# Altium PCB NetV510.PcbDoc
Units mm, origin at the board's own origin, x right, y up, seen from the top; angles counter-clockwise.
Board outline 56.26 x 36.2 mm, 2 copper layers (Top Layer, Bottom Layer); 80 components, 68 nets, 310 pads, 77 vias.
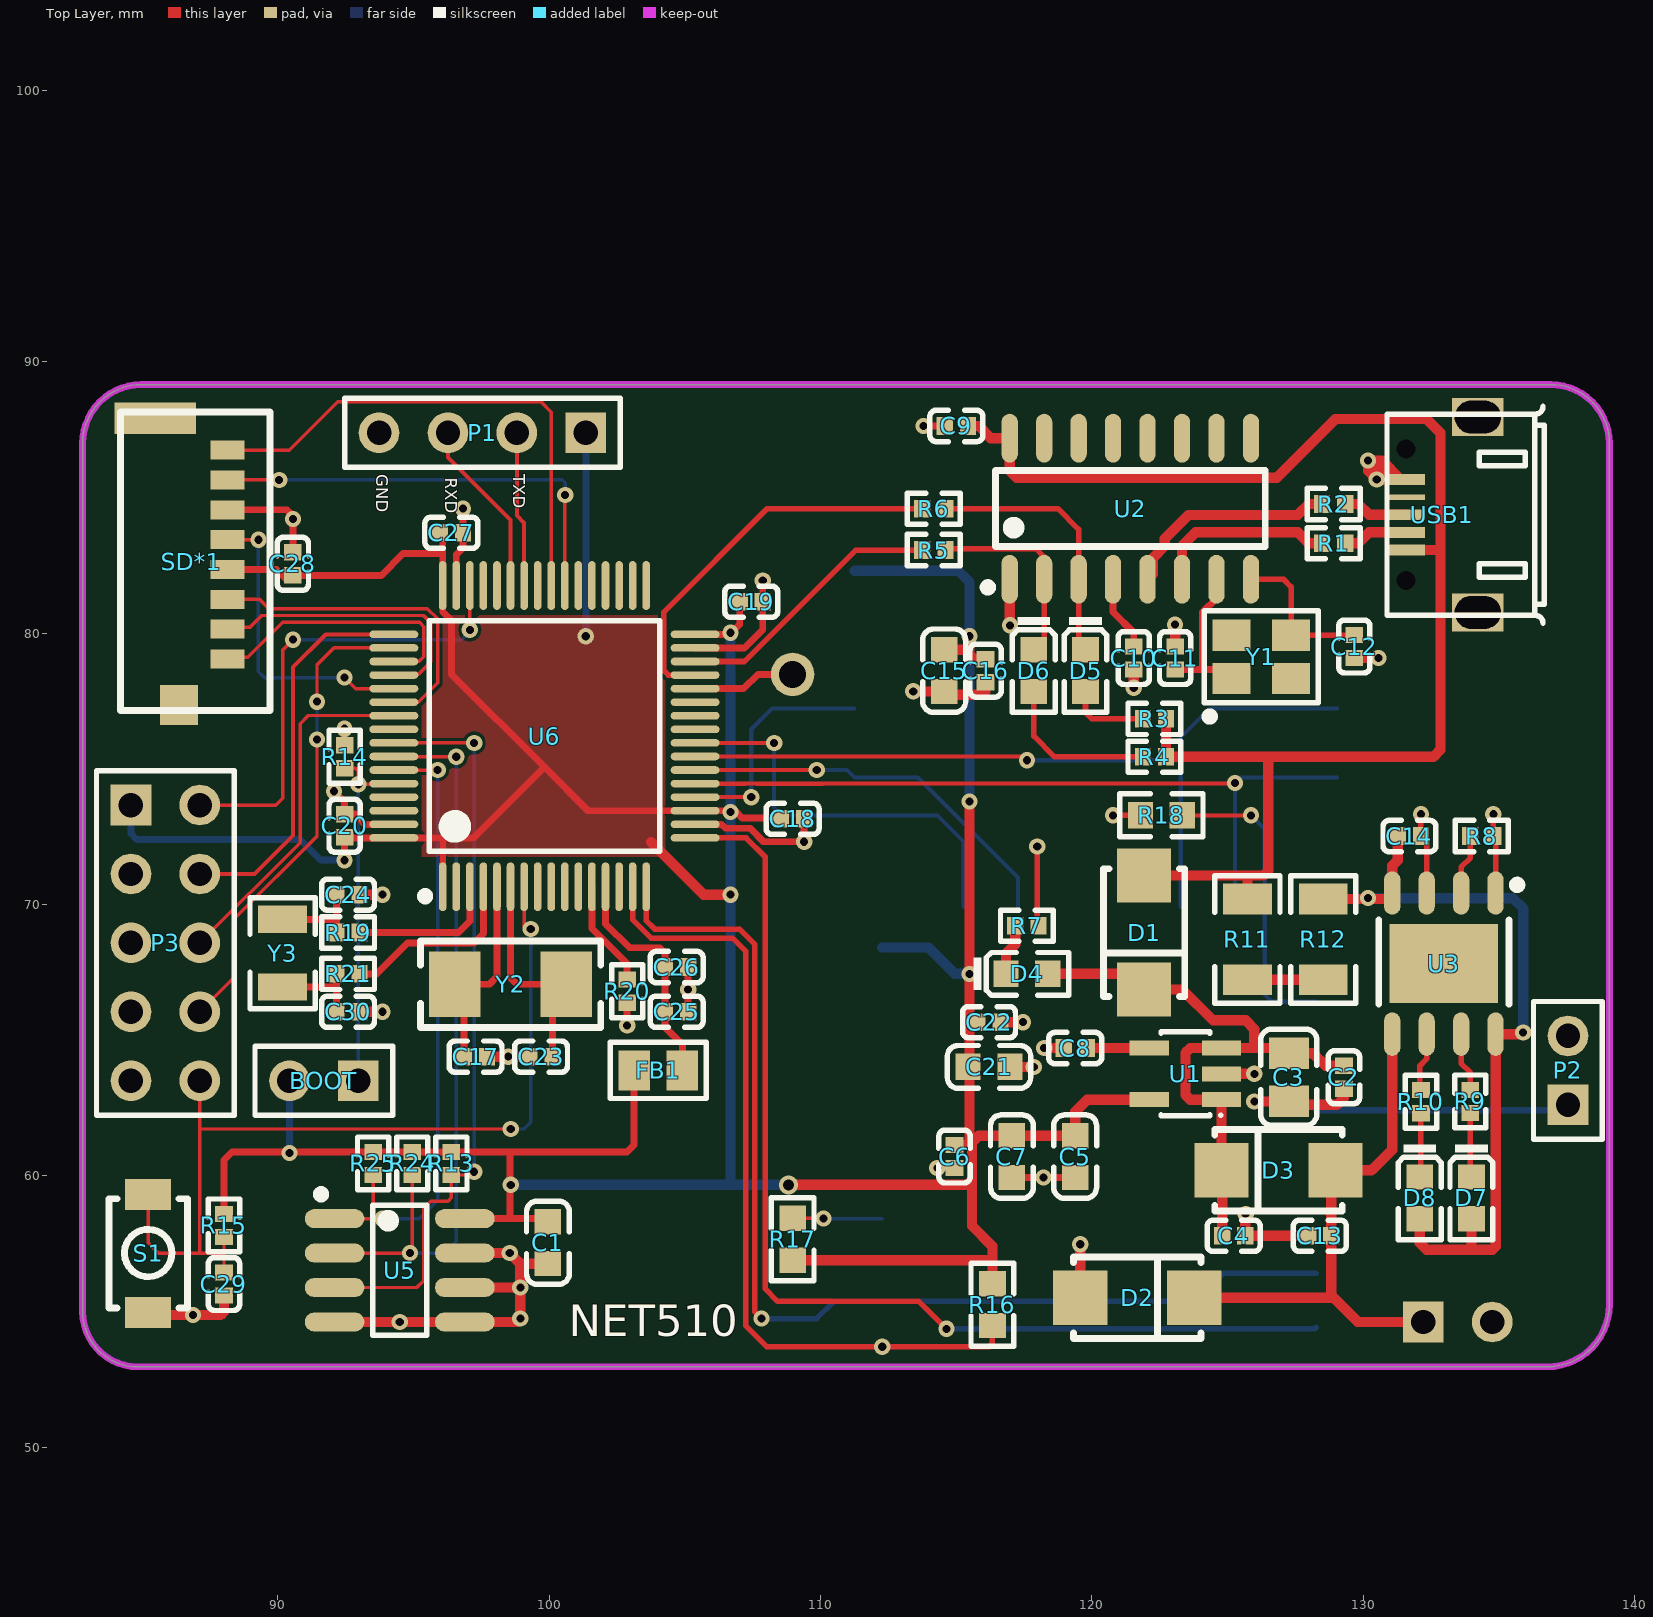
[diagram p0: Top Layer view]
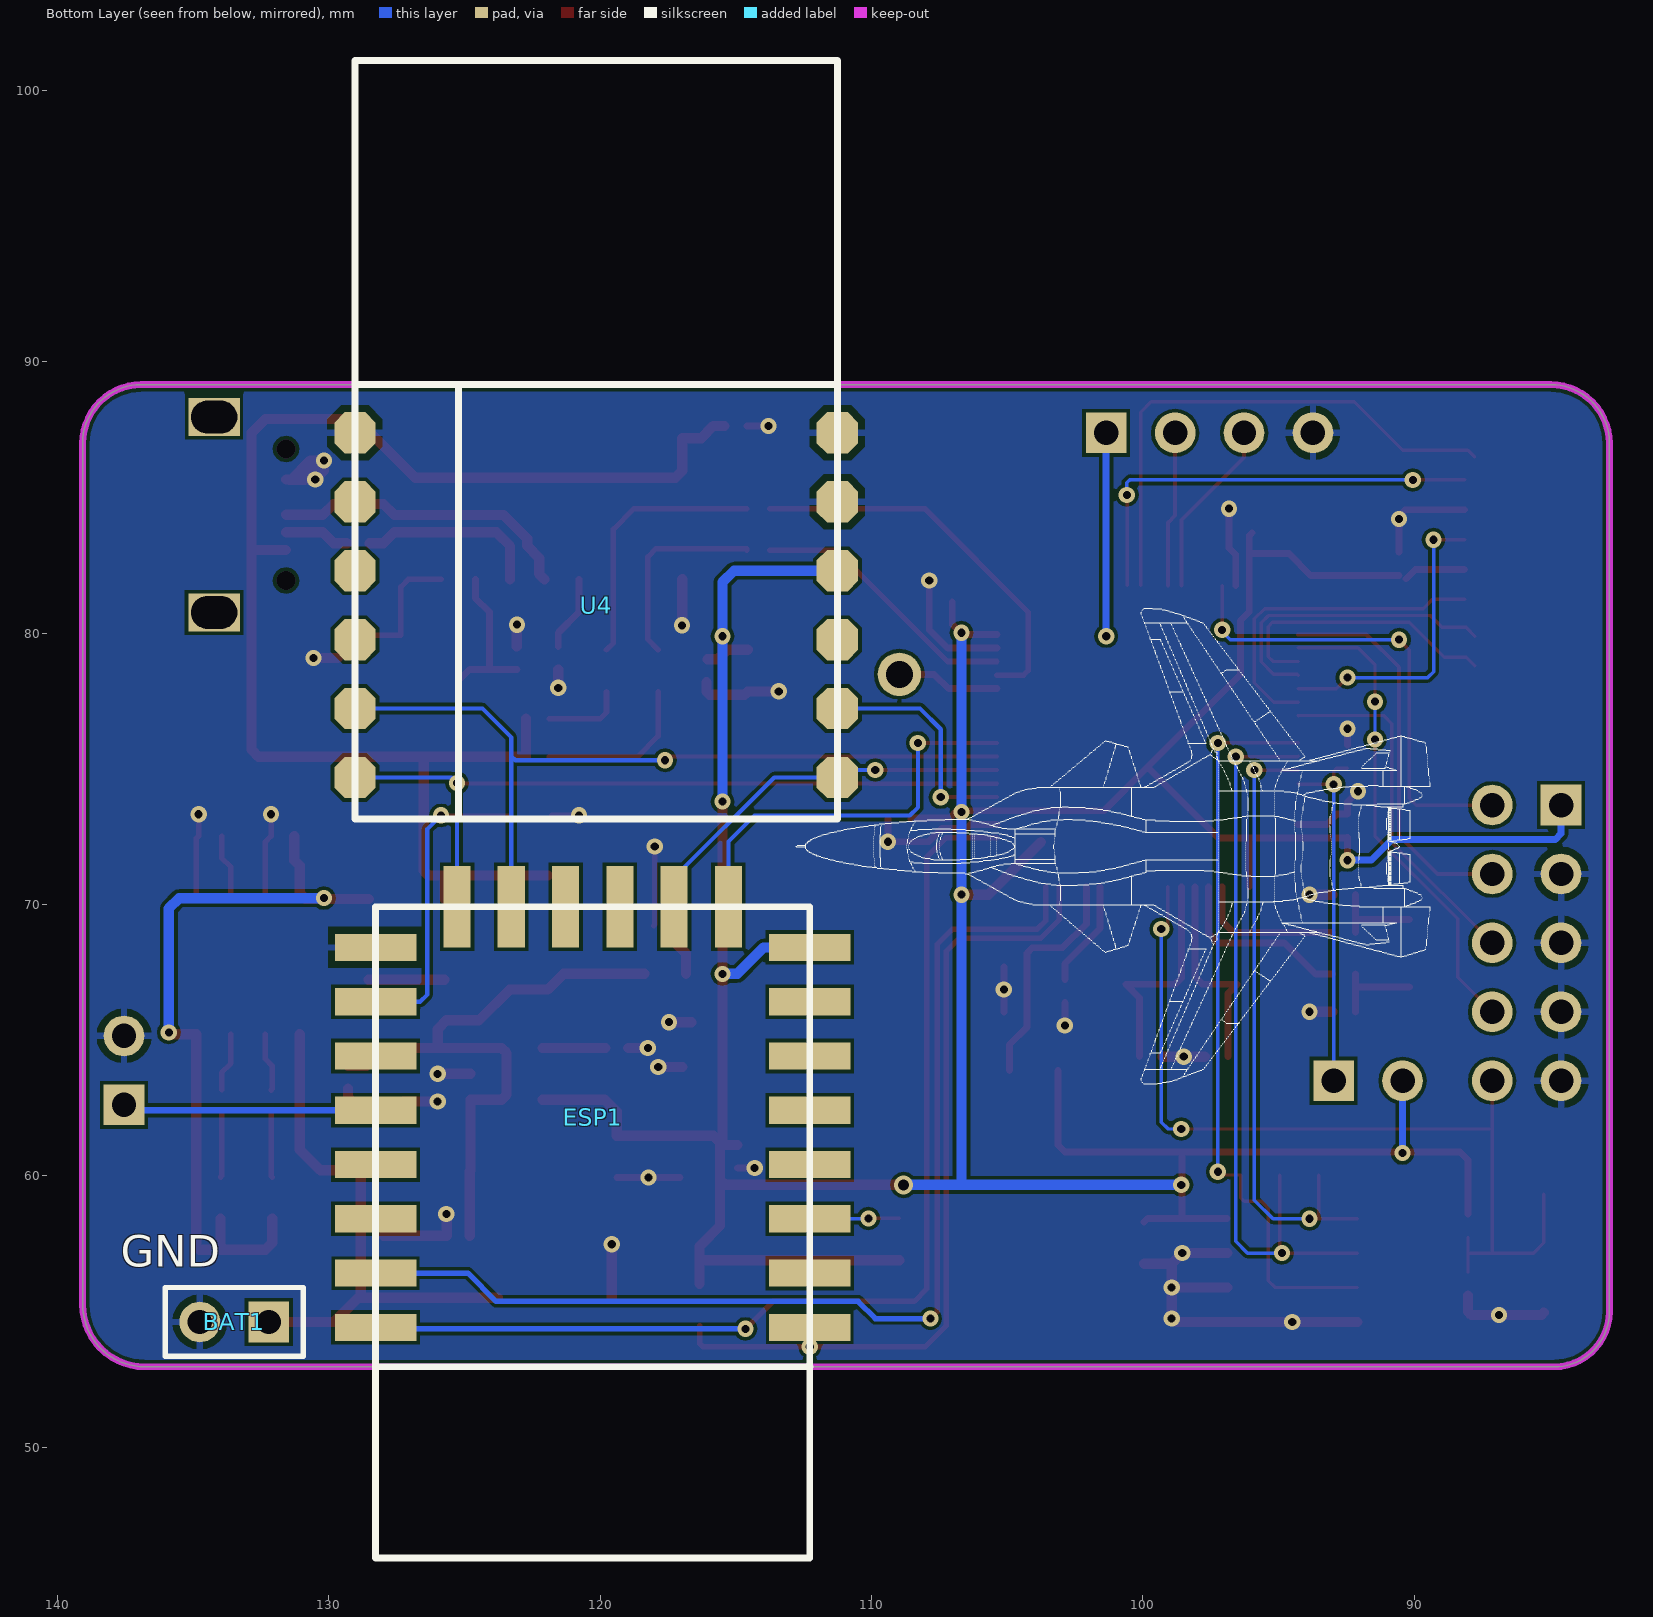
[diagram p1: Bottom Layer view, seen from below]

## Layer stack, top to bottom
Top Solder: solder mask 0.0102, Solder Resist, Dk 3.5
Top Layer: signal copper 0.0356
Dielectric 1: dielectric 0.32, FR-4, Dk 4.8
Bottom Layer: signal copper 0.0356
Bottom Solder: solder mask 0.0102, Solder Resist, Dk 3.5

## Board outline
82.804,54.991 ccw(c84.836,54.991) 84.836,52.959 136.779,52.959 ccw(c136.779,55.245) 139.065,55.245 139.065,86.995 ccw(c136.906,86.995) 136.906,89.154 84.963,89.154 ccw(c84.963,86.995) 82.804,86.995

## Design rules (kind name [scope] priority, off if disabled: settings)
Clearance [All] p1: gap=0.127 ignorepadtopadclearanceinfootprint=FALSE except(0: Arc-Hole Track-Hole SMDPad-Hole THPad-Hole Via-Hole Fill-Hole Poly-Hole Region-Hole Text-Hole; 0.254: Arc-Text Track-Text SMDPad-Text THPad-Text Via-Text Fill-Text Poly-Text Region-Text Text-Text)
DiffPairsRouting [All] p1: maxlimit=0.254 minlimit=0.254 mostfreqgap=0.254 toplayer_minwidth=0.381 toplayer_maxwidth=0.381 toplayer_prefwidth=0.381 bottomlayer_minwidth=0.381 bottomlayer_maxwidth=0.381 bottomlayer_prefwidth=0.381 maxuncoupledlength=12.7
PolygonConnect [All] p1: thpad.connectstyle=Relief thpad.reliefconductorwidth=0.254 thpad.reliefentries=4 thpad.polygonreliefangle="90 Angle" thpad.airgapwidth=0.254 smdpad.connectstyle=Relief smdpad.reliefconductorwidth=0.254 smdpad.reliefentries=4 smdpad.polygonreliefangle="90 Angle" smdpad.airgapwidth=0.254 via.connectstyle=Direct via.reliefconductorwidth=0.254 via.reliefentries=4 via.polygonreliefangle="90 Angle" via.airgapwidth=0.254
RoutingVias [All] p1: holewidth=0.711 width=1.27 viastyle="Through Hole" minholewidth=0.3 minwidth=0.6 maxholewidth=0.711 maxwidth=1.27
SolderMaskExpansion [All] p1: expansion=0.102
Width [All] p1: maxlimit=2.032 minlimit=0.127 preferedwidth=0.254 minimp=50.000000 maximp=50.000000 favimp=50.000000
29 further rules are at their usual default settings.

## Classes and differential pairs
differential pair USB: +USB_P -USB_N
differential pair USB0: +USB0_P -USB0_N

## Components (designator, comment, footprint, x,y, rotation, side; value= is the part's Value field where it differs from the comment)
BAT1 "Header 2" HDR1X2 132.207,54.61 r0 bottom
BOOT "Header 2" HDR1X2 92.964,63.5 r180 top
C1 "22uF (226) 20% 6.3V" 0603_C 99.949,57.531 r90 top
C2 "1.0uF (105) 10% 25V" 0402_C 129.286,63.627 r90 top
C3 "22uF (226) 20% 25V" 0805_C 127.254,63.627 r90 top
C4 "10nF (103) 10% 50V" 0402_C 125.222,57.785 r180 top
C5 "2.2uF (225) 10% 16V" 0603_C 119.38,60.706 r270 top
C6 "10nF (103) 10% 50V" 0402_C 114.935,60.706 r270 top
C7 "22uF (226) 20% 6.3V" 0603_C 117.05,60.706 r270 top
C8 "470pF (471) 10% 50V" 0402_C 119.38,64.704 r180 top
C9 "4.7uF (475) 20% 10V" 0402_C 115.002,87.63 r0 top
C10 "1.0uF (105) 10% 25V" 0402_C 121.539,79.077 r90 top
C11 "22pF (220) 5% 50V" 0402_C 123.063,79.077 r270 top
C12 "22pF (220) 5% 50V" 0402_C 129.667,79.502 r90 top
C13 "10uF" 0402_C 128.397,57.785 r0 top
C14 "10uF" 0402_C 131.699,72.517 r180 top
C15 "22uF (226) 20% 6.3V" 0603_C 114.554,78.613 r270 top
C16 "100nF (104) 10% 16V" 0402_C 116.078,78.613 r90 top
C17 "20pF (200) 5% 50V" 0402_C 97.282,64.389 r180 top
C18 "100nF (104) 10% 16V" 0402_C 108.966,73.152 r180 top
C19 "100nF (104) 10% 16V" 0402_C 107.442,81.153 r180 top
C20 "100nF (104) 10% 16V" 0402_C 92.456,72.898 r270 top
C21 "22uF (226) 20% 6.3V" 0603_C 116.205,64.008 r180 top
C22 "100nF (104) 10% 16V" 0402_C 116.205,65.659 r180 top
C23 "20pF (200) 5% 50V" 0402_C 99.695,64.389 r0 top
C24 "4.7pF (4R7) 0.25pF 50V" 0402_C 92.583,70.358 r180 top
C25 "100nF (104) 10% 16V" 0402_C 104.693,66.04 r0 top
C26 "10nF (103) 10% 50V" 0402_C 104.693,67.691 r0 top
C27 "100nF (104) 10% 16V" 0402_C 96.393,83.693 r180 top
C28 "100nF (104) 10% 16V" 0402_C 90.551,82.55 r90 top
C29 "100nF (104) 10% 16V" 0402_C 88.011,56.007 r90 top
C30 "4.7pF (4R7) 0.25pF 50V" 0402_C 92.583,66.04 r180 top
D1 "SS54" SMA(DO-214AC)_S1 121.92,68.961 r90 top
D2 "M7" SMA(DO-214AC)_S1 121.666,55.499 r180 top
D3 "SS54" SMA(DO-214AC)_S1 126.873,60.198 r0 top
D4 "白灯 0603" 0603_LED_S1 117.602,67.437 r0 top
D5 "黄灯 0603" 0603_LED_S1 119.761,78.613 r270 top
D6 "绿灯 0603" 0603_LED_S1 117.856,78.613 r270 top
D7 "红灯 0603" 0603_LED_S1 133.985,59.182 r270 top
D8 "绿灯 0603" 0603_LED_S1 132.08,59.182 r270 top
ESP1 "ESP-12" ESP-12 120.269,57.912 r0 bottom locked
FB1 "600Ω ±25% 100MHz" 0805_L 104.013,63.881 r0 top
P1 "Header 4" HDR1X4 101.346,87.376 r180 top
P2 "Header 2" HDR1X2 137.541,62.611 r90 top
P3 "JTAG" HDR2X5 84.582,73.66 r270 top
R1 "0Ω (0R0) ±1%" 0402_R 128.905,83.312 r180 top
R2 "0Ω (0R0) ±1%" 0402_R 128.905,84.754 r180 top
R3 "5.1KΩ (5101) ±1%" 0402_R 122.301,76.835 r0 top
R4 "5.1KΩ (5101) ±1%" 0402_R 122.301,75.438 r0 top
R5 "51Ω (51R0) ±1%" 0402_R 114.173,83.058 r0 top
R6 "51Ω (51R0) ±1%" 0402_R 114.173,84.582 r0 top
R7 "5.1KΩ (5101) ±1%" 0402_R 117.602,69.215 r0 top
R8 "1.2KΩ" 0402_R 134.366,72.517 r180 top
R9 "1KΩ" 0402_R 133.941,62.737 r270 top
R10 "1KΩ" 0402_R 132.124,62.73 r270 top
R11 "0.1Ω (R100) ±1%" 1206_R 125.73,68.707 r270 top
R12 "0.1Ω (R100) ±1%" 1206_R 128.524,68.707 r90 top
R13 "200KΩ (2003) ±1%" 0402_R 96.393,60.452 r90 top
R14 "10KΩ (1002) ±1%" 0402_R 92.456,75.438 r90 top
R15 "10KΩ (1002) ±1%" 0402_R 88.011,58.166 r270 top
R16 "10KΩ" 0603_R 116.332,55.245 r270 top
R17 "1KΩ" 0603_R 108.966,57.658 r90 top
R18 "1KΩ" 0603_R 122.555,73.279 r180 top
R19 "0Ω (0R0) ±1%" 0402_R 92.583,68.961 r0 top
R20 "0Ω (0R0) ±1%" 0402_R 102.87,66.802 r270 top
R21 "0Ω (0R0) ±1%" 0402_R 92.583,67.437 r0 top
R24 "10KΩ (1002) ±1%" 0402_R 94.952,60.452 r90 top
R25 "10KΩ (1002) ±1%" 0402_R 93.508,60.452 r90 top
S1 "SW-PB" "key 3*4*2" 85.217,57.15 r90 top
SD*1 "TF_card" TF卡座(短体) 84.201,88.138 r270 top
U1 "MIC5219" SOT-23-5 123.444,63.754 r90 top
U2 "CH340G" SOIC-16_150mil 121.412,84.582 r0 top
U3 "TP4056" SOP-8_EP_150mil 132.969,67.818 r180 top
U4 "MRF24J40" MRF24J40 129.032,73.152 r180 bottom locked
U5 "LM75B" LC-SOIC-8_150mil 94.488,56.515 r270 top
U6 "STM32F103RET6" LQFP-64_10x10x05P 99.822,76.2 r0 top
USB1 "USB_5line" USB-MICRO-5P-2F 131.572,83.058 r270 top
Y1 "12MHZ 20PF 10PPM" SMD-3225_4P 126.238,79.121 r0 top
Y2 "8MHz ±20ppm 20pF" SMD-5032_2P 98.572,67.056 r180 top
Y3 "32.768KHz ±20ppm 12.5pF" "SMD-3215_2P FC - 135" 90.17,68.199 r90 top

## Footprints (in the part's own frame and the unit in brackets; to place one, negate y for a bottom-side part, rotate by r counter-clockwise, add the part's x,y. Pads: shape width x height; smd on the part's side, far side on the other; paste and mask are expansions set on the pad)
0402_C [mm]
  rect 0.6x0.65 smd mask+0.051: 1(-0.425,0) 2(0.425,0)
  silkscreen extent -0.97,-0.58 0.97,0.58, body extent -0.48,-0.3 0.52,0.3, height 0.2
0402_R [mm]
  rect 0.6x0.65 smd mask+0.051: 1(-0.425,0) 2(0.425,0)
  silkscreen extent -0.97,-0.58 0.97,0.58, body extent -0.57,-0.27 0.58,0.28, height 0.41
0603_C [mm]
  rect 0.93x0.98 smd: 1(-0.77,0) 2(0.77,0)
  silkscreen extent -1.53,-0.79 1.54,0.79, body extent -0.8,-0.4 0.8,0.4, height 0.3
0603_LED_S1 [mm]
  rect 0.93x0.98 smd: A(0.77,0) K(-0.77,0)
  silkscreen extent -1.97,-0.79 1.54,0.79, body extent -0.8,-0.4 0.8,0.4, height 0.6
0603_R [mm]
  rect 0.93x0.98 smd: 1(-0.77,0) 2(0.77,0)
  silkscreen extent -1.53,-0.79 1.54,0.79, body extent -0.85,-0.4 0.85,0.4, height 0.56
0805_C [mm]
  rect 1.16x1.47 smd: 1(-0.89,0) 2(0.89,0)
  silkscreen extent -1.77,-1.04 1.77,1.04, body extent -1,-0.62 1,0.63, height 0.77
0805_L [mm]
  rect 1.16x1.47 smd: 1(-0.89,0) 2(0.89,0)
  silkscreen extent -1.77,-1.04 1.77,1.03, body extent -1.02,-0.64 1.03,0.64, height 0.6
1206_R [mm]
  rect 1.13x1.8 smd: 1(-1.49,0) 2(1.49,0)
  silkscreen extent -2.36,-1.2 2.35,1.2, body extent -1.7,-0.86 1.65,0.87, height 0.85
ESP-12 [mm]
  rect 3x1 smd: 1(-8,3.5) 2(-8,1.5) 3(-8,-0.5) 4(-8,-2.5) 5(-8,-4.5) 6(-8,-6.5) 7(-8,-8.5) 8(-8,-10.5) 15(8,-10.5) 16(8,-8.5) 17(8,-6.5) 18(8,-4.5) 19(8,-2.5) 20(8,-0.5) 21(8,1.5) 22(8,3.5)
  rect 1x3 smd: 9(-5,-12) 10(-3,-12) 11(-1,-12) 12(1,-12) 13(3,-12) 14(5,-12)
  silkscreen extent -8,-12 8,12
HDR1X2 [mm] "Connector; Header; 2 Position"
  rect 1.5x1.5 hole 0.9: 1(0,0)
  round 1.5 hole 0.9: 2(2.54,0)
  silkscreen extent -1.27,-1.27 3.81,1.27, body extent -1.27,-1.27 3.81,1.27, height 7.58
HDR1X4 [mm] "Connector; Header; 4 Position"
  rect 1.5x1.5 hole 0.9: 1(0,0)
  round 1.5 hole 0.9: 2(2.54,0) 3(5.08,0) 4(7.62,0)
  silkscreen extent -1.27,-1.27 8.89,1.27, body extent -1.27,-1.27 8.89,1.27, height 7.58
HDR2X5 [mm] "Connector; Header; 5x2 Position"
  rect 1.5x1.5 hole 0.9: 1(0,0)
  round 1.5 hole 0.9: 2(0,2.54) 3(2.54,0) 4(2.54,2.54) 5(5.08,0) 6(5.08,2.54) 7(7.62,0) 8(7.62,2.54) 9(10.16,0) 10(10.16,2.54)
  silkscreen extent -1.27,-1.27 11.43,3.81
"key 3*4*2" [mm]
  rect 1.15x1.7 smd: 1(-2.191,0) 2(2.159,0)
  silkscreen extent -2.03,-1.45 2,1.45
LC-SOIC-8_150mil [mm]
  oval 0.7x2.2 smd: 1(-1.905,-2.4) 2(-0.635,-2.4) 3(0.635,-2.4) 4(1.905,-2.4) 5(1.905,2.4) 6(0.635,2.4) 7(-0.635,2.4) 8(-1.905,2.4)
  silkscreen extent -2.95,-3.05 2.4,1
LQFP-64_10x10x05P [mm]
  oval 0.28x1.8 smd mask+0.051: 1(-3.75,-5.55) 2(-3.25,-5.55) 3(-2.75,-5.55) 4(-2.25,-5.55) 5(-1.75,-5.55) 6(-1.25,-5.55) 7(-0.75,-5.55) 8(-0.25,-5.55) 9(0.25,-5.55) 10(0.75,-5.55) 11(1.25,-5.55) 12(1.75,-5.55) 13(2.25,-5.55) 14(2.75,-5.55) 15(3.25,-5.55) 16(3.75,-5.55) 33(3.75,5.55) 34(3.25,5.55) 35(2.75,5.55) 36(2.25,5.55) 37(1.75,5.55) 38(1.25,5.55) 39(0.75,5.55) 40(0.25,5.55) 41(-0.25,5.55) 42(-0.75,5.55) 43(-1.25,5.55) 44(-1.75,5.55) 45(-2.25,5.55) 46(-2.75,5.55) 47(-3.25,5.55) 48(-3.75,5.55)
  oval 1.8x0.28 smd mask+0.051: 17(5.55,-3.75) 18(5.55,-3.25) 19(5.55,-2.75) 20(5.55,-2.25) 21(5.55,-1.75) 22(5.55,-1.25) 23(5.55,-0.75) 24(5.55,-0.25) 25(5.55,0.25) 26(5.55,0.75) 27(5.55,1.25) 28(5.55,1.75) 29(5.55,2.25) 30(5.55,2.75) 31(5.55,3.25) 32(5.55,3.75) 49(-5.55,3.75) 50(-5.55,3.25) 51(-5.55,2.75) 52(-5.55,2.25) 53(-5.55,1.75) 54(-5.55,1.25) 55(-5.55,0.75) 56(-5.55,0.25) 57(-5.55,-0.25) 58(-5.55,-0.75) 59(-5.55,-1.25) 60(-5.55,-1.75) 61(-5.55,-2.25) 62(-5.55,-2.75) 63(-5.55,-3.25) 64(-5.55,-3.75)
  silkscreen extent -4.55,-6.05 4.25,4.25
MRF24J40 [mil]
  oct 60x60 smd: 1(0,560) 2(0,460) 3(0,360) 4(0,260) 5(0,160) 6(0,60) 7(700,60) 8(700,160) 9(700,260) 10(700,360) 11(700,460) 12(700,560)
  silkscreen extent 0,0 700,1100
SMA(DO-214AC)_S1 [mm]
  rect 2x2 smd: 1(2.1,0) 2(-2.1,0)
  silkscreen extent -2.35,-1.5 2.35,1.5
"SMD-3215_2P FC - 135" [mm]
  rect 1x1.8 smd: 1(-1.25,0) 2(1.25,0)
  silkscreen extent -2.05,-1.2 2.05,1.2
SMD-3225_4P [mm]
  rect 1.4x1.15 smd: 1(-1.1,-0.8) 2(1.1,-0.8) 3(1.1,0.8) 4(-1.1,0.8)
  silkscreen extent -2.1,-2.35 2.1,1.7, body extent -1.6,-1.25 1.6,1.25, height 0.61
SMD-5032_2P [mm]
  rect 1.9x2.4 smd: 1(-2.05,0) 2(2.05,0)
  silkscreen extent -3.32,-1.6 3.32,1.6
SOIC-16_150mil [mm]
  oval 0.6x1.8 smd: 1(-4.445,-2.6) 2(-3.175,-2.6) 3(-1.905,-2.6) 4(-0.635,-2.6) 5(0.635,-2.6) 6(1.905,-2.6) 7(3.175,-2.6) 8(4.445,-2.6) 9(4.445,2.6) 10(3.175,2.6) 11(1.905,2.6) 12(0.635,2.6) 13(-0.635,2.6) 14(-1.905,2.6) 15(-3.175,2.6) 16(-4.445,2.6)
  silkscreen extent -5.4,-3.05 4.97,1.4, body extent -4.95,-2.97 4.95,3.03, height 1.75
SOP-8_EP_150mil [mm]
  rect 4x2.9 smd: 0(0,0)
  oval 0.6x1.6 smd: 1(-1.905,-2.6) 2(-0.635,-2.6) 3(0.635,-2.6) 4(1.905,-2.6) 5(1.905,2.6) 6(0.635,2.6) 7(-0.635,2.6) 8(-1.905,2.6)
  silkscreen extent -2.85,-3.05 2.4,1.5
SOT-23-5 [mm] "SOT-23/SC-74A; 5 Leads; Body 3.1 x 3 mm, inc. leads (LxW max)"
  rect 0.55x1.45 smd: 1(-0.95,-1.329) 2(0,-1.329) 3(0.95,-1.329) 4(0.95,1.329) 5(-0.95,1.329)
  silkscreen extent -1.57,-1.35 1.55,0.9
TF卡座(短体) [mm]
  rect 1.15x3 smd: 0(0.227,1.27)
  rect 1.48x1.4 smd: 0(10.795,2.159)
  rect 0.7x1.25 smd: 1(9.097,3.937) 2(7.997,3.937) 3(6.897,3.937) 4(5.797,3.937) 5(4.697,3.937) 6(3.597,3.937) 7(2.497,3.937) 8(1.397,3.937)
  silkscreen extent 0,0 11,5.5
USB-MICRO-5P-2F [mm]
  round 0 hole 0.7: 0(-3.725,0) 0(1.125,0)
  rect 0.4x1.4 smd: 1(0,0) 2(-0.65,0) 3(-1.3,0) 5(-2.6,0)
  rect 0.2x1.4 smd: 4(-1.95,0)
  rect 1.4x1.9 hole 1.2 slot 1.7 at 90 deg: 6(2.3,2.65) 7(-4.9,2.65)
  silkscreen extent -5.3,-0.7 2.7,5.1

## Part data
BAT1 BOOT P2: "Header, 2-Pin", LatestRevisionDate=17-Jul-2002, LatestRevisionNote="Re-released for DXP Platform.", Publisher="Altium Limited"
C1 C7 C15 C21: library part "0603 22uF (226) 20% 6.3V", "贴片电容", Package=0603, SuppliersPartNumber=C59461, ComponentLink1URL=http://www.szlcsc.com/product/details_60514.html, Supplier=LC
  C1 C15 C21: ComponentLink1Description=供应商
  C7: ComponentLink1Description=供应商链接
C2 C10: library part "0402 1.0uF (105) 10% 25V", "贴片电容", Package=0402, SuppliersPartNumber=C52923, ComponentLink1Description=供应商链接, ComponentLink1URL=http://www.szlcsc.com/product/details_53938.html, Supplier=LC
C3: library part "0805 22uF (226) 20% 25V", "贴片电容", Package=0805, SuppliersPartNumber=C45783, ComponentLink1Description=供应商链接, ComponentLink1URL=http://www.szlcsc.com/product/details_46786.html, Supplier=LC
C4 C6 C26: library part "0402 10nF (103) 10% 50V", "贴片电容", Package=0402, SuppliersPartNumber=C15195, ComponentLink1Description=供应商链接, ComponentLink1URL=http://www.szlcsc.com/product/details_15869.html, Supplier=LC
C5: library part "0603 2.2uF (225) 10% 16V", "贴片电容", Package=0603, SuppliersPartNumber=C23630, ComponentLink1Description=供应商链接, ComponentLink1URL=http://www.szlcsc.com/product/details_24366.html, Supplier=LC
C8: library part "0402 470pF (471) 10% 50V", "贴片电容", Package=0402, SuppliersPartNumber=C1537, ComponentLink1Description=供应商链接, ComponentLink1URL=http://www.szlcsc.com/product/details_1889.html, Supplier=LC
C9: library part "0402 4.7uF (475) 20% 10V", "贴片电容", Package=0402, SuppliersPartNumber=C23733, ComponentLink1Description=供应商链接, ComponentLink1URL=http://www.szlcsc.com/product/details_24469.html, Supplier=LC
C11 C12: library part "0402 22pF (220) 5% 50V", "贴片电容", Package=0402, SuppliersPartNumber=C1555, ComponentLink1Description=供应商链接, ComponentLink1URL=http://www.szlcsc.com/product/details_1907.html, Supplier=LC
C13 C14: library part "0402 10uF (106) 20% 6.3V", "贴片电容", Package=0402, SuppliersPartNumber=C15525, ComponentLink1Description=供应商, ComponentLink1URL=http://www.szlcsc.com/product/details_16204.html, Supplier=LC
C16 C18 C19 C20 C22 C25 C27 C28 C29: library part "0402 100nF (104) 10% 16V", "贴片电容", Package=0402, SuppliersPartNumber=C1525, ComponentLink1URL=http://www.szlcsc.com/product/details_1877.html, Supplier=LC
  C16 C18 C19 C20 C22 C25 C29: ComponentLink1Description=供应商链接
  C27 C28: ComponentLink1Description=供应商
C17 C23: library part "0402 20pF (200) 5% 50V", "贴片电容", Package=0402, SuppliersPartNumber=C1554, ComponentLink1Description=供应商链接, ComponentLink1URL=http://www.szlcsc.com/product/details_1906.html, Supplier=LC
C24 C30: library part "0402 4.7pF (4R7) 0.25pF 50V", "贴片电容", Package=0402, SuppliersPartNumber=C1569, ComponentLink1Description=供应商链接, ComponentLink1URL=http://www.szlcsc.com/product/details_1921.html, Supplier=LC
D1 D3: library part "SMA(DO-214AC) SS54", "二极管", Package=SMA(DO-214AC), SuppliersPartNumber=C22452, ComponentLink1Description=供应商链接, ComponentLink1URL=http://www.szlcsc.com/product/details_23178.html, Supplier=LC
D2: library part "SMA(DO-214AC) M7", "二极管", Package=SMA(DO-214AC), SuppliersPartNumber=C95872, ComponentLink1Description=供应商链接, ComponentLink1URL=http://www.szlcsc.com/product/details_2841.html, Notepad="1N4007 4007 编号C2464 已经停售, 使用新物料编号C95872", Supplier=LC
D4: library part "0603 白灯", "发光二极管", Package=0603, SuppliersPartNumber=C2290, ComponentLink1Description=供应商链接, ComponentLink1URL=http://www.szlcsc.com/product/details_2663.html, Supplier=LC
D5: library part "0603 黄灯", "发光二极管", Package=0603, SuppliersPartNumber=C72038, ComponentLink1Description=供应商链接, ComponentLink1URL=http://www.szlcsc.com/product/details_73147.html, Supplier=LC
D6 D8: library part "0603 绿灯", "发光二极管", Package=0603, SuppliersPartNumber=C72043, ComponentLink1URL=http://www.szlcsc.com/product/details_73152.html, Supplier=LC
  D6: ComponentLink1Description=供应商链接
  D8: ComponentLink1Description=供应商
D7: library part "0603 红灯", "发光二极管", Package=0603, SuppliersPartNumber=C2286, ComponentLink1Description=供应商, ComponentLink1URL=http://www.szlcsc.com/product/details_2659.html, Supplier=LC
FB1: library part "0805 600Ω 25% 100MHz", "贴片磁珠", Package=0805, SuppliersPartNumber=C1017, ComponentLink1Description=供应商链接, ComponentLink1URL=http://www.szlcsc.com/product/details_1369.html, Supplier=LC
P1: "Header, 4-Pin", LatestRevisionDate=17-Jul-2002, LatestRevisionNote="Re-released for DXP Platform.", Publisher="Altium Limited"
P3: library part "Header 5X2", "Header, 5-Pin, Dual row", LatestRevisionDate=17-Jul-2002, LatestRevisionNote="Re-released for DXP Platform.", Publisher="Altium Limited"
R1 R2 R19 R20 R21: library part "0402 0Ω (0R0) 1%", "贴片电阻", Package=0402, SuppliersPartNumber=C17168, ComponentLink1Description=供应商链接, ComponentLink1URL=http://www.szlcsc.com/product/details_17853.html, Supplier=LC
R3 R4 R7: library part "0402 5.1KΩ (5101) 1%", "贴片电阻", Package=0402, SuppliersPartNumber=C25905, ComponentLink1Description=供应商链接, ComponentLink1URL=http://www.szlcsc.com/product/details_26648.html, Supplier=LC
R5 R6: library part "0402 51Ω (51R0) 1%", "贴片电阻", Package=0402, SuppliersPartNumber=C25125, ComponentLink1Description=供应商链接, ComponentLink1URL=http://www.szlcsc.com/product/details_25868.html, Supplier=LC
R8: library part "0402 1.2KΩ (1201) 1%", "贴片电阻", Package=0402, SuppliersPartNumber=C25862, ComponentLink1Description=供应商, ComponentLink1URL=http://www.szlcsc.com/product/details_26605.html, Supplier=LC
R9 R10: library part "0402 1KΩ (1001) 1%", "贴片电阻", Package=0402, SuppliersPartNumber=C11702, ComponentLink1Description=供应商, ComponentLink1URL=http://www.szlcsc.com/product/details_12256.html, Supplier=LC
R11 R12: library part "1206 0.1Ω (R100) 1%", "贴片电阻", Package=1206, SuppliersPartNumber=C25334, ComponentLink1Description=供应商链接, ComponentLink1URL=http://www.szlcsc.com/product/details_26077.html, Supplier=LC
R13: library part "0402 200KΩ (2003) 1%", "贴片电阻", Package=0402, SuppliersPartNumber=C25764, ComponentLink1Description=供应商链接, ComponentLink1URL=http://www.szlcsc.com/product/details_26507.html, Supplier=LC
R14 R15 R24 R25: library part "0402 10KΩ (1002) 1%", "贴片电阻", Package=0402, SuppliersPartNumber=C25744, ComponentLink1URL=http://www.szlcsc.com/product/details_26487.html, Supplier=LC
  R14 R15: ComponentLink1Description=供应商链接
  R24 R25: ComponentLink1Description=供应商
R16: library part "0603 10KΩ (1002) 1%", "贴片电阻", Package=0603, SuppliersPartNumber=C25804, ComponentLink1Description=供应商链接, ComponentLink1URL=http://www.szlcsc.com/product/details_26547.html, Supplier=LC
R17 R18: library part "0603 1KΩ (1001) 1%", "贴片电阻", Package=0603, SuppliersPartNumber=C21190, ComponentLink1Description=供应商链接, ComponentLink1URL=http://www.szlcsc.com/product/details_21904.html, Supplier=LC
S1: "Switch", LatestRevisionDate=17-Jul-2002, LatestRevisionNote="Re-released for DXP Platform.", PackageDescription="Switch; 2 Leads", PackageReference=SPST-2, Published=24-Mar-1999, Publisher="Altium Limited"
U1: "LDO"
U2: library part CH340G_[C14267], "USB", Package=SOIC-16_150mil, SuppliersPartNumber=C14267, ComponentLink1Description=供应商链接, ComponentLink1URL=http://www.szlcsc.com/product/details_14927.html, Supplier=LC
U3: library part TP4056_[C16581], "电池电源管理", Package=SOP-8_EP_150mil, SuppliersPartNumber=C16581, ComponentLink1Description=供应商, ComponentLink1URL=http://www.szlcsc.com/product/details_17264.html, Supplier=LC
U6: "ARM", Package=LQFP-64_10x10x05P, SuppliersPartNumber=C8322, ComponentLink1Description=供应商, ComponentLink1URL=http://www.szlcsc.com/product/details_8814.html, Supplier=LC
Y1: library part "SMD-3225_4P  12MHZ 20PF 10PPM", "贴片晶振", Package=SMD-3225_4P, SuppliersPartNumber=C9002, ComponentLink1Description=供应商链接, ComponentLink1URL=http://www.szlcsc.com/product/details_9522.html, Supplier=LC
Y2: library part "SMD-5032_2P 8MHz 20ppm 20pF", "贴片晶振", Package=SMD-5032_2P, SuppliersPartNumber=C115962, ComponentLink1Description=供应商链接, ComponentLink1URL=http://www.szlcsc.com/product/details_117214.html, Supplier=LC
Y3: library part "SMD-3215_2P 32.768KHz 20ppm 12.5pF", "贴片晶振", Package=SMD-3215_2P, SuppliersPartNumber=C32346, ComponentLink1Description=供应商链接, ComponentLink1URL=http://www.szlcsc.com/product/details_33310.html, Supplier=LC

## Free pads (board coordinates)
  round 1.6 hole 1: 2(108.966,78.477)

## Via types
v1: diameter 0.6, hole 0.3, Top Layer to Bottom Layer, tented both sides, 76 vias
v2: diameter 0.7, hole 0.4, Top Layer to Bottom Layer, tented both sides, 1 vias

## Nets (pads, with @x,y where several pads share a name; then routed paths per layer and width w, separated by ;. In a path a pad name is that pad's centre, name@x,y a point inside that pad or via, vN(x,y) a via of type N, cw(c..) or ccw(c..) an arc to the next point about the centre after c; other vN are vias at no path point)
3.3V: BOOT.2 C1.2 C5.1 C6.1 C7.1 C15.1 C16.2 C18.2 C19.2 C20.2 C21.2 C22.2 C27.2 C28.1 ESP1.8 FB1.1 P1.1 P3.1 R13.2 R15.1 R16.1 R17.1 R24.2 R25.2 SD*1.4 U1.5 U4.10 U5.8 U6.1 U6.19 U6.32 U6.48 U6.64 | length 180.4
  Top Layer w0.254: R15.1 88.011,60.579 88.309,60.877 R25.2 R24.2 R13.2 98.552,60.877 ; SD*1.4 89.954,82.341 C28.1@90.297,81.998 ; C28.1 93.809,82.125 94.615,82.931 96.072,82.931 ; v1(92.456,71.628) C20.2 92.479,72.45 U6.64 96.139,72.45 ; C27.2 96.072,83.589 96.072,82.931 ; U6.1 96.072,72.383 96.139,72.45 ; U5.8 98.552,58.42 ; C1.2 99.83,58.42 98.552,58.42 ; FB1.1 103.123,61.131 102.869,60.877 98.552,60.877 ; U6.32 106.659,79.95 107.017,80.308 C19.2 ; C18.2 108.506,73.187 107.109,73.187 106.846,73.45 U6.19 101.429,73.45 99.822,75.057 ; 96.072,82.931 U6.48 96.072,80.798 96.402,80.468 96.402,78.477 99.822,75.057 ; 96.139,72.45 97.215,72.45 99.822,75.057 ; 98.552,58.42 98.552,60.877
  Top Layer w0.381: 103.749,72.296 105.687,70.358 v1(106.68,70.358) ; v2(108.812,59.663) 115.392,59.663 115.578,59.849 ; R17.1 116.324,56.888 116.332,56.896 ; C15.1 115.308,79.383 115.48,79.211 ; C6.1 115.487,61.131 ; v1(115.487,73.787) v1(115.487,67.437) 115.487,61.303 ; v1(115.487,79.883) 115.487,79.217 115.48,79.211 ; C16.2@116.034,79.038 115.653,79.038 115.48,79.211 ; R16.1 116.332,56.896 ; U1.5 119.828,62.804 119.38,62.356 C5.1 C7.1 115.832,61.476 115.573,61.217 ; 115.487,61.131 115.573,61.217 ; 115.487,61.131 115.487,61.303 ; 115.487,61.303 115.573,61.217 ; 115.573,61.217 115.578,61.213 115.578,59.849 ; 115.578,59.849 115.578,58.158 116.332,57.404 116.332,56.896
  Bottom Layer w0.254: P3.1 84.582,72.604 84.796,72.39 90.805,72.39 91.567,71.628 v1(92.456,71.628) ; BOOT.2 90.424,60.836 v1(90.427,60.833) ; v1(101.346,79.883) P1.1
  Bottom Layer w0.381: v1(98.579,59.663) 106.68,59.663 ; v1(106.68,80.01) v1(106.68,73.406) v1(106.68,70.358) 106.68,59.663 ; v2(108.812,59.663) 106.68,59.663 ; U4.10 115.062,82.296 115.487,81.871 v1(115.487,79.883) v1(115.487,73.787) ; ESP1.8 113.96,68.412 114.935,67.437 v1(115.487,67.437)
4V2: BAT1.1 C13.2 D2.2 D3.1 U3.5 | length 20.2
  Top Layer w0.381: D2.2 128.822,55.499 ; U3.5 131.064,60.96 130.302,60.198 D3.1 128.822,60.047 C13.2 128.822,55.499 ; BAT1.1 129.794,54.61 128.905,55.499 128.822,55.499
AGND: R20.1 U6.12 | length 4
  Top Layer w0.254: U6.12 101.572,69.116 102.87,67.818 R20.1
AVDD: C25.1 C26.1 FB1.2 U6.13 | length 8.6
  Top Layer w0.254: U6.13 102.072,69.279 102.949,68.402 104.064,68.402 104.268,68.198 C26.1 C25.1 104.268,65.471 104.903,64.836 FB1.2
BOOT0: BOOT.1 R14.1 U6.60 | length 13.3
  Top Layer w0.127: R14.1 92.857,75.013 92.964,74.906 v1(92.964,74.422) 94.244,74.422 U6.60
  Bottom Layer w0.127: BOOT.1 v1(92.964,74.422)
BOOT1: pad.2 U6.28 | length 3.8
  Top Layer w0.254: U6.28 107.16,77.95 107.687,78.477 pad.2
CH340_RXD: D5.K R6.2 U2.3 | length 9.8
  Top Layer w0.203: R6.2 118.745,84.582 119.507,83.82 U2.3 119.507,79.637 D5.K
CH340_TXD: D6.K R5.2 U2.2 | length 7.4
  Top Layer w0.203: R5.2 114.598,83.111 117.93,83.111 118.237,82.804 U2.2 118.237,79.764 D6.K
ESP-RST: ESP1.1 R16.2 U6.15 | length 29.8
  Top Layer w0.203: U6.15 103.072,69.435 103.749,68.758 106.756,68.758 107.239,68.275 107.239,54.473 108.016,53.696 116.205,53.696 116.324,53.815 R16.2@116.324,54.475
  other v1: 112.268,53.696
GND: BAT1.2 C1.1 C2.1 C3.1 C4.1 C5.2 C6.2 C7.2 C8.2 C9.1 C10.1 C11.1 C12.1 C13.1 C14.1 C15.2 C16.1 C17.1 C18.1 C19.1 C20.1 C21.1 C22.1 C23.1 C24.1 C25.2 C26.2 C27.1 C28.2 C29.1 C30.1 D2.1 ESP1.15 P1.4 P2.2 P3.3 P3.5 P3.7 P3.9 R7.2 R8.1 R14.2 R18.2 R20.2 S1.1 SD*1.6 U1.2 U2.1 U3.1 U3.3 U4.1 U4.11 U4.12 U5.4 U5.5 U5.6 U5.7 U6.18 U6.31 U6.47 U6.63 USB1.5 | length 81.3
  Top Layer w0.203: v1(117.983,72.136) 117.983,69.259 R7.2 ; v1(120.777,73.279) R18.2 ; v1(132.124,73.323) C14.1 132.334,72.307 U3.3 ; v1(134.791,73.323) R8.1 134.874,72.434 U3.1
  Top Layer w0.254: SD*1.6 90.341,84.541 90.551,84.331 v1(90.551,84.201) C28.2 ; v1(92.067,74.168) 92.456,73.779 C20.1 92.837,73.323 93.21,72.95 U6.63 ; R14.2 v1(92.456,76.47) ; U6.47 96.572,82.894 96.818,83.14 C27.1 v1(96.818,84.582) ; v1(102.869,65.532) v1(102.869,65.532) R20.2 ; C25.2 C26.2 ; U6.18 106.353,72.95 106.497,72.806 107.402,72.806 107.901,72.307 v1(109.391,72.307) C18.1 ; U6.31 107.185,79.45 107.867,80.132 C19.1 v1(107.867,81.933) ; v1(113.792,87.63) C9.1 ; v1@114.471,60.281 C6.2 ; C7.2 v1(118.215,59.936) C5.2
  Top Layer w0.381: S1.1 85.312,54.864 v1(86.868,54.864) 87.884,54.864 88.011,54.991 C29.1 ; U5.4 v1(94.488,54.61) U5.5 98.806,54.61 v1(98.933,54.737) v1(98.933,55.88) ; C30.1 v1(93.853,66.04) ; C24.1 v1(93.853,70.358) ; U5.6 v1(98.933,55.88) ; U5.7 v1(98.544,57.15) 98.933,56.761 ; C17.1 v1(98.488,64.389) C23.1 ; C1.1 98.933,56.761 ; v1(113.411,77.851) 113.419,77.843 C15.2 114.673,77.724 115.951,77.724 116.078,77.851 C16.1 ; C22.1 v1(117.46,65.659) ; U2.1 116.967,80.29 v1(116.975,80.282) ; C21.1 v1(117.856,64.008) ; v1(118.237,64.704) C8.2 ; D2.1 v1(119.566,57.472) ; v1(121.539,77.978) C10.1 ; C11.1 v1(123.063,80.308) ; U1.2 v1(125.984,63.754) ; v1(125.662,58.591) 125.647,58.576 C4.1 C13.1 ; v1(125.984,62.738) v1(125.984,62.738) C3.1 127.38,62.611 129.032,62.611 129.286,62.865 C2.1 ; C12.1 v1(130.556,79.077) ; 130.429,86.106 USB1.5@130.877,85.658 ; USB1.5@131.445,85.641 USB1.5@131.402,85.641 ; USB1.5 USB1.5@131.385,85.658 ; v1(98.933,55.88) 98.933,56.761 ; USB1.5@130.877,85.658 130.894,85.641 USB1.5@131.402,85.641 ; USB1.5@130.877,85.658 USB1.5@131.385,85.658 ; USB1.5@130.877,85.658 v1(130.496,85.658) 130.175,85.979 v1(130.175,86.36) 130.683,86.36 USB1.5@131.385,85.658 ; USB1.5@131.385,85.658 USB1.5@131.402,85.641
  other v1: 114.3,60.281 105.118,66.865
I2C1_SCL: R24.1 U5.2 U6.58 | length 27.7
  Top Layer w0.127: U5.2 v1(94.869,57.15) 94.952,57.233 R24.1 ; U6.58 94.275,75.453 94.288,75.44 v1(96.57,75.44)
  Bottom Layer w0.127: v1(94.869,57.15) 96.139,57.15 96.57,57.581 v1(96.57,75.44)
I2C1_SDA: R25.1 U5.1 U6.59 | length 23.2
  Top Layer w0.127: U5.1 93.472,58.42 ; R25.1 93.508,58.456 93.472,58.42 ; v1(93.853,58.412) 93.845,58.42 93.472,58.42 ; U6.59 v1(95.885,74.95)
  Bottom Layer w0.127: v1(93.853,58.412) 95.198,58.412 95.885,59.099 v1(95.885,74.95)
JTAG_TCK: P3.4 U6.49 | length 14.4
  Top Layer w0.152: P3.4 89.131,71.12 90.551,72.54 90.551,78.74 91.761,79.95 U6.49
JTAG_TDI: P3.8 U6.50 | length 17.7
  Top Layer w0.127: P3.8 88.392,67.31 88.392,69.469 91.44,72.517 v1(91.44,76.073) ; v1(91.44,77.47) 91.44,78.823 92.067,79.45 U6.50
  Bottom Layer w0.127: v1(91.44,76.073) v1(91.44,77.47)
JTAG_TDO: P3.6 U6.55 | length 13.2
  Top Layer w0.127: P3.6 90.818,72.276 90.818,76.654 91.124,76.96 94.262,76.96 U6.55
JTAG_TMS: P3.2 U6.46 | length 17.4
  Top Layer w0.127: P3.2 89.916,73.66 90.17,73.914 90.17,79.375 v1(90.551,79.756) ; v1(97.072,80.115) U6.46
  Bottom Layer w0.127: v1(90.551,79.756) 96.774,79.756 v1@97.028,80.01
n_RST: C29.2 P3.10 R15.2 S1.2 U6.7 | length 33.5
  Top Layer w0.127: S1.2 85.217,57.531 85.598,57.15 87.122,57.15 ; P3.10 87.122,61.722 ; C29.2 88.011,57.15 ; R15.2 88.011,57.15 ; v1(98.579,61.722) 87.122,61.722 ; U6.7 99.072,69.227 99.06,69.215 99.187,69.215 v1(99.314,69.088) ; 87.122,57.15 87.122,61.722 ; 87.122,57.15 88.011,57.15
  Bottom Layer w0.127: v1(98.579,61.722) 99.06,61.722 99.314,61.976 v1(99.314,69.088)
NetC8_1: C8.1 U1.4 | length 2.3
  Top Layer w0.381: C8.1 U1.4
NetC11_2: C11.2 U2.7 Y1.1 | length 5.8
  Top Layer w0.254: C11.2 124.079,78.652 ; U2.7 124.587,81.28 124.079,80.772 124.079,78.652 ; Y1.1 124.807,78.652 124.079,78.652
NetC12_2: C12.2 U2.8 Y1.3 | length 5.7
  Top Layer w0.203: U2.8 127.06,81.982 127.338,81.704 Y1.3 129.661,79.921 C12.2
NetC17_2: C17.2 U6.5 Y2.2 | length 7.8
  Top Layer w0.254: C17.2 96.857,66.721 Y2.2 97.79,67.056 98.072,67.338 U6.5
NetC23_2: C23.2 U6.6 Y2.1 | length 8.4
  Top Layer w0.254: U6.6 98.572,67.29 98.806,67.056 Y2.1 100.12,66.554 C23.2
NetC24_2: C24.2 R19.1 Y3.2 | length 3.4
  Top Layer w0.254: Y3.2 92.138,69.449 92.158,69.469 ; R19.1 92.158,69.469 ; C24.2 92.158,69.469
NetC30_2: C30.2 R21.1 Y3.1 | length 3.4
  Top Layer w0.254: Y3.1 92.138,66.949 92.158,66.929 ; C30.2 92.158,66.929 ; R21.1 92.158,66.929
NetD4_K: D4.K R7.1 | length 1.9
  Top Layer w0.381: D4.K 116.832,68.191 117.177,68.536 R7.1
NetD5_A: D5.A R3.1 | length 3
  Top Layer w0.203: D5.A 119.761,77.077 120.003,76.835 R3.1
NetD6_A: D6.A R4.1 | length 6
  Top Layer w0.203: D6.A 117.856,76.2 118.618,75.438 R4.1
NetD7_K: D7.K R9.2 | length 2.4
  Top Layer w0.203: R9.2 133.941,59.996 D7.K
NetD8_K: D8.K R10.2 | length 2.4
  Top Layer w0.203: D8.K 132.124,59.996 R10.2
NetESP1_3: ESP1.3 R17.2 | length 3.3
  Top Layer w0.127: R17.2 110.101,58.428 v1(110.109,58.42)
  Bottom Layer w0.127: v1(110.109,58.42) 110.117,58.412 ESP1.3
NetESP1_16: ESP1.16 R18.1 | length 11.4
  Top Layer w0.152: R18.1 v1(125.857,73.279)
  Bottom Layer w0.152: v1(125.857,73.279) 126.365,72.771 126.365,66.675 126.628,66.412 ESP1.16
NetESP1_18: ESP1.18 P2.1 | length 9.4
  Bottom Layer w0.254: ESP1.18 137.342,62.412 P2.1
NetR8_2: R8.2 U3.2 | length 2.2
  Top Layer w0.203: U3.2 133.604,71.374 133.941,71.711 R8.2
NetR9_1: R9.1 U3.7 | length 2.2
  Top Layer w0.203: U3.7 133.604,64.135 133.941,63.798 R9.1
NetR10_1: R10.1 U3.6 | length 2.2
  Top Layer w0.203: R10.1 132.08,63.199 132.08,64.052 132.334,64.306 U3.6
NetR11_2: R11.2 R12.1 | length 2.8
  Top Layer w0.381: R11.2 R12.1
NetR19_2: R19.2 U6.3 | length 5.5
  Top Layer w0.254: R19.2 96.647,68.961 97.072,69.386 U6.3
NetR21_2: R21.2 U6.4 | length 6.9
  Top Layer w0.254: R21.2 93.637,67.437 94.78,68.58 97.231,68.58 97.572,68.921 U6.4
NJTRST: U6.56
OS_IO: R13.1 U5.3 U6.57 | length 27.7
  Top Layer w0.127: U5.3 95.123,55.88 95.377,56.134 95.377,58.801 95.631,59.055 96.266,59.055 96.393,59.182 R13.1 97.111,60.027 v1(97.231,60.147) ; U6.57 97.227,75.95 v1(97.231,75.946)
  Bottom Layer w0.127: v1(97.231,60.147) v1(97.231,75.946)
PTB18: U4.4
PTB19: U4.3
PTB20: U4.2
SDIO_CK: SD*1.5 U6.53 | length 11.3
  Top Layer w0.127: SD*1.5 89.279,83.441 v1(89.281,83.439) ; v1(92.456,78.359) 92.865,77.95 U6.53
  Bottom Layer w0.127: v1(89.281,83.439) 89.281,78.577 89.499,78.359 v1(92.456,78.359)
SDIO_CMD: SD*1.3 U6.54 | length 12.3
  Top Layer w0.127: SD*1.3 89.32,81.241 89.662,80.899 95.504,80.899 95.885,80.518 95.885,78.161 95.174,77.45 U6.54
SDIO_D0: SD*1.7 U6.39 | length 16.3
  Top Layer w0.127: SD*1.7 v1(90.043,85.641) ; U6.39 100.572,85.078 v1(100.584,85.09)
  Bottom Layer w0.127: v1(90.043,85.641) 100.44,85.641 100.457,85.658 100.584,85.531 v1(100.584,85.09)
SDIO_D1: SD*1.8 U6.40 | length 19.7
  Top Layer w0.127: SD*1.8@87.757,86.487 88.011,86.741 SD*1.8 90.424,86.741 92.202,88.519 99.695,88.519 100.072,88.142 U6.40
SDIO_D2: SD*1.1 U6.51 | length 10.6
  Top Layer w0.127: SD*1.1@87.757,78.787 88.075,79.105 88.884,79.105 90.17,80.391 95.222,80.391 95.377,80.236 95.377,79.13 95.197,78.95 U6.51
SDIO_D3: SD*1.2 U6.52 | length 11.3
  Top Layer w0.127: SD*1.2@87.757,79.887 88.075,80.205 88.968,80.205 89.408,80.645 95.363,80.645 95.631,80.377 95.631,78.937 95.18,78.486 94.308,78.486 U6.52
SPI1_PCS0: U4.8 U6.20 | length 8.7
  Top Layer w0.152: U6.20 v1(107.442,73.95)
  Bottom Layer w0.152: v1(107.442,73.95) 107.442,76.454 108.204,77.216 U4.8
SPI1_PCS1: ESP1.9 U6.24 | length 15.2
  Top Layer w0.152: U6.24 v1(108.287,75.95)
  Bottom Layer w0.152: v1(108.287,75.95) 108.287,73.577 108.585,73.279 114.3,73.279 115.269,72.31 ESP1.9
SPI1_SCK: ESP1.14 U4.6 U6.21 | length 28.3
  Top Layer w0.152: U6.21 105.372,74.447 107.227,74.447 107.234,74.453 107.65,74.453 107.657,74.447 110.063,74.447 110.067,74.45 v1@125.222,74.45
  Bottom Layer w0.152: ESP1.14 v1(125.269,74.469) 125.476,74.676 U4.6
SPI1_SIN: ESP1.10 U4.7 U6.22 | length 14.6
  Top Layer w0.152: U6.22 v1(109.855,74.95)
  Bottom Layer w0.152: v1(109.855,74.95) 110.978,74.95 U4.7 113.579,74.676 117.269,70.986 ESP1.10
SPI1_SOUT: ESP1.13 U4.5 U6.23 | length 30.5
  Top Layer w0.152: U6.23 105.372,75.453 108.072,75.453 108.079,75.447 108.495,75.447 108.502,75.453 117.46,75.453 v1(117.602,75.311)
  Bottom Layer w0.152: v1(117.602,75.311) 123.118,75.311 123.257,75.45 123.269,75.438 ; ESP1.13 123.269,75.438 ; U4.5 124.333,77.216 123.269,76.152 123.269,75.438
UART1_RX: P1.3 U6.43 | length 6.6
  Top Layer w0.152: P1.3 96.266,86.473 98.572,84.167 U6.43
UART1_TX: P1.2 U6.42 | length 5.7
  Top Layer w0.152: P1.2 98.806,84.328 99.072,84.062 U6.42
UART2_RX: ESP1.22 U6.17 | length 39.7
  Top Layer w0.203: U6.17 107.255,72.45 107.95,71.755 107.95,55.836 108.414,55.372 113.624,55.372 v1(114.64,54.356)
  Bottom Layer w0.203: v1(114.64,54.356) 128.213,54.356 ESP1.22
UART2_TX: ESP1.21 U6.16 | length 40.6
  Top Layer w0.203: U6.16 103.572,69.402 103.886,69.088 107.017,69.088 107.569,68.536 107.569,54.991 v1(107.823,54.737)
  Bottom Layer w0.203: v1(107.823,54.737) 109.855,54.737 110.49,55.372 123.825,55.372 124.865,56.412 ESP1.21
UART3_RX: R5.1 U6.30 | length 10.1
  Top Layer w0.203: U6.30 107.188,78.95 111.296,83.058 R5.1
UART3_TX: R6.1 U6.29 | length 14.5
  Top Layer w0.203: U6.29 104.386,78.45 104.221,78.615 104.221,80.77 108.033,84.582 R6.1
USB0_N: R1.1 USB1.2 | length 2.4
  Top Layer w0.381: R1.1 129.82,83.312 130.216,83.708 USB1.2
USB0_P: R2.1 USB1.3 | length 2.4
  Top Layer w0.381: R2.1 129.82,84.754 130.216,84.358 USB1.3
USB_N: R1.2 U2.6 | length 6.8
  Top Layer w0.381: U2.6 123.317,83.207 123.825,83.715 127.586,83.715 127.989,83.312 R1.2
USB_P: R2.2 U2.5 | length 8.1
  Top Layer w0.381: U2.5 122.237,82.173 122.237,82.763 122.682,83.207 122.682,83.471 123.562,84.35 127.586,84.35 127.989,84.754 R2.2
V3: C10.2 U2.4 | length 2.8
  Top Layer w0.254: U2.4 120.777,80.772 121.539,80.01 C10.2
Vbus: C9.2 D1.1 R3.2 R4.2 R11.1 U2.16 USB1.1 | length 54.3
  Top Layer w0.381: C9.2 115.824,87.63 116.272,87.182 U2.16 116.967,85.979 117.221,85.725 126.806,85.725 128.965,87.884 132.334,87.884 132.842,87.376 132.842,83.058 ; D1.1 125.73,71.061 ; R3.2 R4.2 126.492,75.438 ; R11.1 125.73,71.061 ; USB1.1 132.842,83.058 ; 125.73,71.061 126.306,71.061 126.492,71.247 126.492,75.438 ; 126.492,75.438 132.588,75.438 132.842,75.692 132.842,83.058
VCC: C2.2 C3.2 C4.2 D1.2 D3.2 D4.A U1.1 U1.3 | length 23.3
  Top Layer w0.381: D4.A 121.344,67.437 D1.2 123.326,66.861 124.46,65.727 125.662,65.727 125.984,65.405 125.984,64.704 ; C4.2 124.797,60.174 D3.2 U1.1 123.623,62.804 123.444,62.983 123.444,64.525 123.623,64.704 U1.3 125.984,64.704 ; C2.2 128.607,64.052 128.142,64.517 C3.2 127.067,64.704 125.984,64.704
VFIFT: C14.2 D7.A D8.A R12.2 U3.4 U3.8 | length 29.1
  Top Layer w0.381: R12.2 130.843,70.197 U3.4 131.064,71.418 131.274,71.628 C14.2 ; D8.A 132.08,57.531 132.334,57.277 133.858,57.277 ; D7.A 133.985,57.404 133.858,57.277 ; v1(135.89,65.278) 135.83,65.218 U3.8 134.874,57.404 134.747,57.277 133.858,57.277
  Bottom Layer w0.381: v1(130.175,70.231) 135.509,70.231 135.89,69.85 v1(135.89,65.278)
pads on no net: ESP1.2 ESP1.4 ESP1.5 ESP1.6 ESP1.7 ESP1.11 ESP1.12 ESP1.17 ESP1.19 ESP1.20 SD*1.0 U2.9 U2.10 U2.11 U2.12 U2.13 U2.14 U2.15 U3.0 U4.9 U6.2 U6.8 U6.9 U6.10 U6.11 U6.14 U6.25 U6.26 U6.27 U6.33 U6.34 U6.35 U6.36 U6.37 U6.38 U6.41 U6.44 U6.45 U6.61 U6.62 USB1.0 USB1.4 USB1.6 USB1.7 Y1.2 Y1.4

## Polygon pours and split planes (outlines as drawn)
3.3V on Top Layer "3.3V_L01_P002" (solid, remove dead copper, pour order 2): 95.744,80.659 95.695,80.708 95.3,80.708 95.3,71.755 104.268,71.755 104.268,80.645
GND on Bottom Layer "GND_L02_P004" (solid, remove dead copper, pour order 4): 139.065,89.154 139.065,52.959 82.804,52.959 82.804,89.154

## Keep-outs
Keep-Out Layer:
  the board outline again, w0.254

## Silkscreen, mask and mechanical layers (free items; w line width, h text height)
Top Overlay:
  text "GND" at 93.472,85.852 h0.76 r270
  text "TXD" at 98.52,85.852 h0.76 r270
  text "RXD" at 96.012,85.725 h0.76 r270
  text "NET510" at 100.711,53.696 h2
Bottom Overlay:
  drawing of 6902 lines, arcs and shapes, not listed
  text "GND" at 137.668,56.261 h2